# EAGLE board CoolTech (EAGLE 9.7.0)
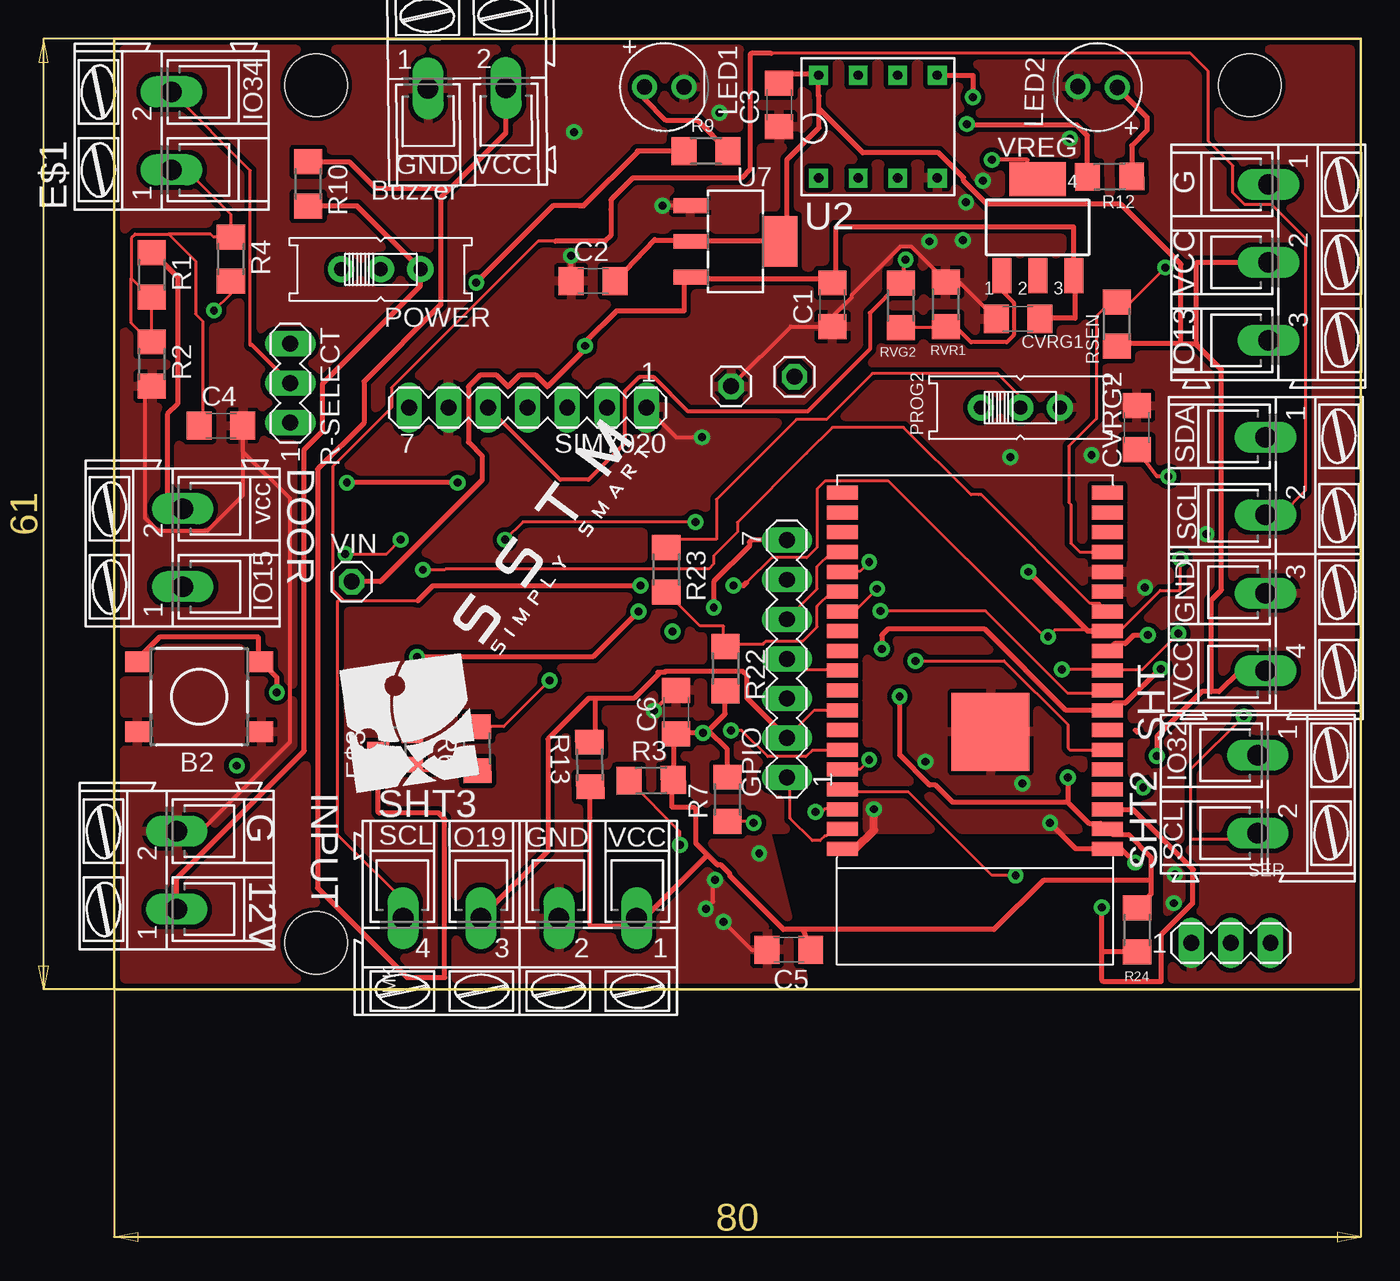
[diagram p0: board, top side]
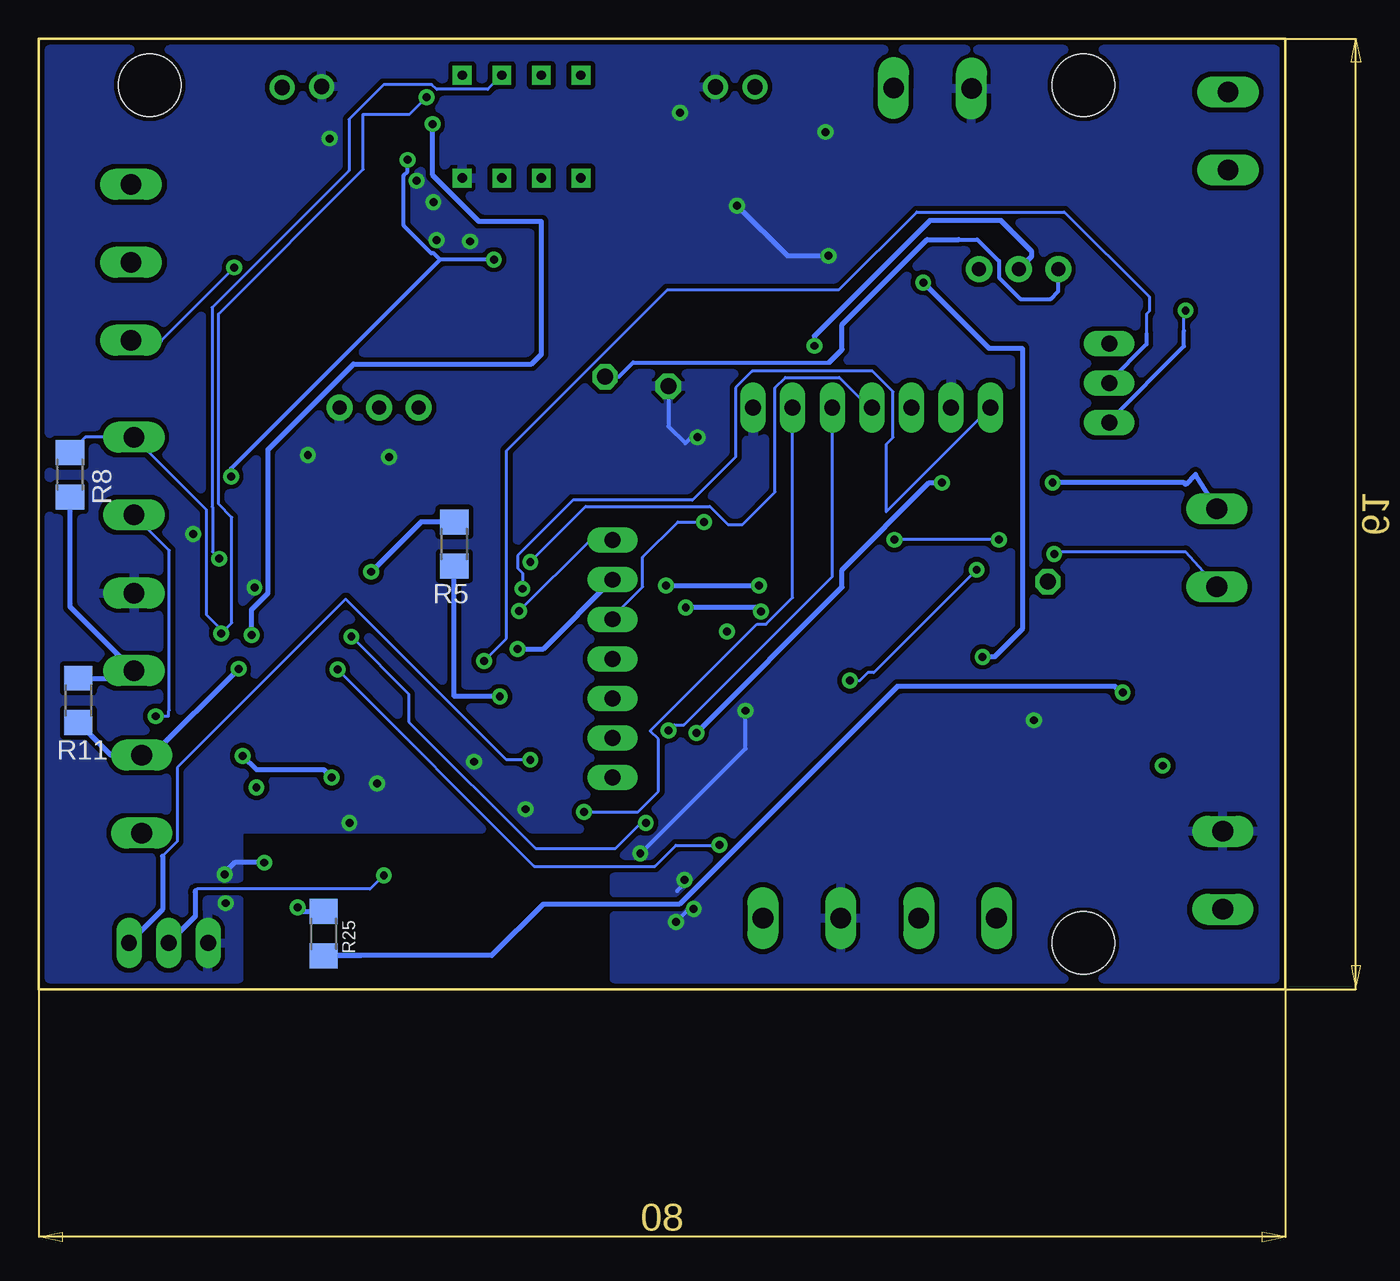
[diagram p1: board, bottom side, seen from below]

Size 80 x 61 mm. Coordinates in mm from the lower left corner, seen from the top.
Outline: 0,0 80,0 80,61 0,61 0,0
Copper layers (1*16): Top / Bottom
Stack-up Default Layer Stack: Top User Defined 0.035mm / Dielectric-1 User Defined 1.5mm / Bottom User Defined 0.035mm
Design rules: minimum copper width class=1 12mil, minimum copper width class=2 10mil, minimum copper width 8mil, minimum copper width class=0 6mil, minimum drill size 20mil, minimum drill size class=1 12mil, minimum drill size class=2 10mil, minimum drill size class=0 6mil, copper clearance class=1 to class=1 12mil, copper clearance class=2 to class=2 8mil, copper clearance wire_polygon to wire_polygon 8mil, copper clearance wire_polygon to pad_smd 8mil, copper clearance wire_polygon to via 8mil, copper clearance pad_smd to pad_smd 8mil, copper clearance pad_smd to via 8mil, copper clearance via to via 8mil, copper clearance smd to pad (same net) 8mil, copper clearance smd to via (same net) 8mil, copper clearance smd to smd (same net) 8mil, copper clearance class=0 to class=0 6mil, dimension clearance 10mil, via restrict clearance 0mil, restrict clearance 0mil, drill distance 8mil, keepout clearance 0mil
Net classes: 0 default: width 0.152 mm, drill 0.152 mm, clearance 0.152 mm; 1 ac: width 0.305 mm, drill 0.305 mm, clearance 0.305 mm; 2 power: width 0.254 mm, drill 0.254 mm, clearance 0.203 mm
Holes 4 mm at 72.9,58.04 12.95,58.04 12.95,2.97

## Footprints (pad centres in the part's own frame; a part is rotated, then mirrored left to right if it is on the bottom)
DTSM-6 = smd 1.55 x 1.3: 1 -3.975,2.25; 2 3.975,2.25; 3 -3.975,-2.25; 4 3.975,-2.25
C1206 = smd 1.6 x 1.8: 1 -1.4,0; 2 1.4,0
AK300/3 = drill 1.321 long: 1 -5.004,0; 2 0,0; 3 5.004,0
1X01 = drill 1.016 octagon: 1 0,0
AK300/2 = drill 1.321 long: 1 -2.515,0; 2 2.489,0
SOT23 = smd 1 x 1.4: 1 -0.95,-1.1; 2 0.95,-1.1; 3 0,1.1
ESP32-WROVER = smd 2 x 0.9: 1 0,22.86; 2 0,21.59; 3 0,20.32; 4 0,19.05; 5 0,17.78; 6 0,16.51; 7 0,15.24; 8 0,13.97; 9 0,12.7; 10 0,11.43; 11 0,10.16; 12 0,8.89; 13 0,7.62; 14 0,6.35; 15 0,5.08; 16 0,3.81; 17 0,2.54; 18 0,1.27; 19 0,0; 20 17,0; 21 17,1.27; 22 17,2.54; 23 17,3.81; 24 17,5.08; 25 17,6.35; 26 17,7.62; 27 17,8.89; 28 17,10.16; 29 17,11.43; 30 17,12.7; 31 17,13.97; 32 17,15.24; 33 17,16.51; 34 17,17.78; 35 17,19.05; 36 17,20.32; 37 17,21.59; 38 17,22.86 | smd 5 x 5: 39 7.5,15.36
MA07-1 = drill 1.016 long: 1 -7.62,0; 2 -5.08,0; 3 -2.54,0; 4 0,0; 5 2.54,0; 6 5.08,0; 7 7.62,0
LEDRD254W60D565H860B_W = drill 0.981 pad 1.581: A -1.27,0; C 1.27,0
EG1218 = drill 0.9 pad 1.676: O -2.54,0; P 0,0; S 2.54,0
R1206 = smd 1.6 x 1.803: 1 -1.422,0; 2 1.422,0
MA03-1 = drill 1.016 long: 1 -2.54,0; 2 0,0; 3 2.54,0
AK300/4 = drill 1.321 long: 1 -7.493,0; 2 -2.515,0; 3 2.515,0; 4 7.493,0
AA_DIP8 = drill 0.6 square: P0 -3.81,3.81; P1 -3.81,1.27; P2 -3.81,-1.27; P3 -3.81,-3.81; P4 2.79,-3.81; P5 2.79,-1.27; P6 2.79,1.27; P7 2.79,3.81
SOT223 = smd 0.95 x 2.15: 1 -2.3,-2.9; 2 0,-2.9; 3 2.3,-2.9 | smd 3.25 x 2.15: 4 0,2.9
SOT223' = smd 1.219 x 2.235: 1 -2.311,-3.099; 2 0,-3.099; 3 2.311,-3.099 | smd 3.6 x 2.2: 4 0,3.099

## Placement (x,y rotation side)
B2  DTSM-6  [DTSM-6]  5.46,18.78 0 top
C1  10u  [C1206]  46.1,43.94 90 top
C2  10u  [C1206]  30.73,45.47 0 top
C3  0.1u  [C1206]  42.67,56.77 90 top
C4  10u  [C1206]  6.86,36.17 0 top
C5  22uf  [C1206]  43.31,2.54 180 top
C6  0.1u  [C1206]  36.07,17.78 90 top
CVRG1  0.1u  [C1206]  58.02,43.03 0 top
CVRG2  1u  [C1206]  65.64,36.06 270 top
DALLAS  [AK300/3]  74.09,46.66 270 top
DC+  [1X01]  43.66,39.32 0 top
DOOR  [AK300/2]  4.39,28.35 90 top
E$1  [AK300/2]  3.68,55.12 90 top
E$2  [AK300/2]  22.66,57.83 0.5 top
E$3  [SOT23]  18.03,15.37 90 top
ESP32_WROVER  ESP32-WROVER  [ESP32-WROVER]  63.75,31.88 180 top
G4  [1X01]  39.6,38.71 0 top
GPIO  [MA07-1]  43.18,21.21 90 top
INPUT  [AK300/2]  4.01,7.65 90 top
LED1  [LEDRD254W60D565H860B_W]  35.31,57.91 0 top
LED2  [LEDRD254W60D565H860B_W]  63.12,57.91 178.7 top
POWER  [EG1218]  17.11,46.21 0 top
PROG2  [EG1218]  58.17,37.34 0 top
R1  10k  [R1206]  2.41,45.85 270 top
R2  10k  [R1206]  2.41,40.13 270 top
R3  10k  [R1206]  34.47,13.41 0.8 top
R4  22  [R1206]  7.49,46.86 270 top
R5  4.7k  [R1206]  53.34,28.57 270 bottom
R6  4.7k  [R1206]  23.29,15.44 90.9 top
R7  10k  [R1206]  39.37,12.19 90 top
R8  4.7k  [R1206]  78.01,33.02 270 bottom
R9  1k  [R1206]  37.99,53.81 180 top
R10  0.7K  [R1206]  12.45,51.69 270 top
R11  4.7k  [R1206]  77.47,18.54 270 bottom
R12  1k  [R1206]  63.89,52.15 0.7 top
R13  4.7k  [R1206]  30.53,14.43 90.9 top
R22  10k  [R1206]  39.24,20.57 270 top
R23  470  [R1206]  35.43,26.92 270 top
R24  10k  [R1206]  65.66,3.81 90 top
R25  470  [R1206]  61.72,3.57 90 bottom
R-SELECT  [MA03-1]  11.3,38.9 90 top
RSEN  4.7K  [R1206]  64.35,42.69 90 top
RVG2  240  [R1206]  50.49,43.89 90 top
RVR1  560  [R1206]  53.38,43.96 270 top
SER0  [MA03-1]  71.68,2.97 0 top
SHT  [AK300/4]  73.91,27.94 270 top
SHT2  [AK300/2]  73.41,12.52 270 top
SHT3  [AK300/4]  26.04,4.57 180 top
SIM7020  [MA07-1]  26.54,37.34 180 top
U2  FT24C512A  [AA_DIP8]  49.02,55.88 90 top
U7  LM1117MP-3.3  [SOT223]  39.88,48.01 270 top
U$2  LOGO5  [LOGO5]  19.8,8.72 53.4 top
VIN  [1X01]  15.24,26.16 0 top
VREG  317EMP  [SOT223']  59.27,48.9 0 top

## Library data of the parts
B2 = switch-tact
C1-C6 CVRG1 CVRG2 = eagle-ltspice; SPICEMODEL: NONE; SPICEPREFIX: C
DALLAS DOOR INPUT = con-ptr500+
DC+ G4 VIN = pinhead
E$1 E$2 SHT2 = con-ptr500
E$3 = Transistor
ESP32_WROVER = esp32-wrover
GPIO SER0 SIM7020 = con-lstb; OC_FARNELL: unknown; OC_NEWARK: unknown
LED1 LED2 = Opto-Electronic
POWER PROG2 = adafruit
R1-R13 R22-R25 RSEN RVG2 RVR1 = eagle-ltspice; SPICEMODEL: NONE; SPICEPREFIX: R
R-SELECT = con-lstb
SHT SHT3 = con-ptr500; OC_FARNELL: unknown; OC_NEWARK: unknown
U2 = FT24C512A
U7 = lm1117_10; MF: Texas Instruments; MPN: LM1117MP-3.3; OC_FARNELL: 9778195; OC_NEWARK: 28X3416
U$2 = bagylib
VREG = linear

## Nets
3.3V [ac]: C2.2 C3.2 C5.1 C6.1 DALLAS.2 DOOR.2 ESP32_WROVER.2 R1.1 R3.2 R5.2 R7.2 R8.2 R11.1 R13.1 R22.2 R24.2 RSEN.1 SHT3.1 SHT.4 U2.P7 U7.2 U7.4
EN: ESP32_WROVER.3 R24.1 R25.2
GND [power]: B2.3 B2.4 C1.1 C2.1 C3.1 C4.2 C5.2 C6.2 CVRG1.1 CVRG2.1 E$2.1 E$3.2 ESP32_WROVER.1 ESP32_WROVER.14 ESP32_WROVER.15 ESP32_WROVER.38 ESP32_WROVER.39 G4.1 INPUT.2 LED1.C LED2.C PROG2.S R2.2 RVR1.1 SER0.1 SHT3.2 SHT.3 SIM7020.1 SIM7020.6 U2.P3 U7.1
IO0: ESP32_WROVER.25 R22.1 R23.2
IO2: ESP32_WROVER.24 SIM7020.4
IO4: ESP32_WROVER.26 SIM7020.7
IO5: ESP32_WROVER.29 GPIO.4
IO13: DALLAS.3 ESP32_WROVER.16 RSEN.2
IO14: ESP32_WROVER.13 R6.2
IO15: DOOR.1 ESP32_WROVER.23 GPIO.5
IO18: GPIO.3
IO19: ESP32_WROVER.31 GPIO.2 R13.2 SHT3.3
IO21: ESP32_WROVER.33 SIM7020.3
IO22: ESP32_WROVER.36 SIM7020.2
IO26: ESP32_WROVER.11 R12.1
IO32: ESP32_WROVER.8 GPIO.6 R11.2 SHT2.1
IO33: ESP32_WROVER.9 GPIO.7 R9.2
IO34: E$1.2 ESP32_WROVER.6 R-SELECT.2
MOSI2: ESP32_WROVER.37 GPIO.1
N$10 [power]: DC+.1 POWER.O
N$32: LED1.A R9.1
N$34: RVG2.1 RVR1.2 VREG.1
N$37 [ac]: INPUT.1 POWER.S R10.2
N$41: PROG2.P R23.1
N$42: B2.1 B2.2 R25.1
RX: ESP32_WROVER.34 SER0.3
S$1: C4.1 E$1.1 R1.2 R2.1 R4.1
S$3: LED2.A R12.2
S$4: R4.2 R-SELECT.1
S$7: E$3.1 R6.1
S$8: ESP32_WROVER.30
S$10: E$2.2 E$3.3 R10.1
S_VN: ESP32_WROVER.5
S_VP: ESP32_WROVER.4
SCL_ESP: ESP32_WROVER.12 R5.1 R7.1 SHT2.2 SHT3.4 SHT.2 U2.P5
SDA_ESP: ESP32_WROVER.10 R3.1 R8.1 SHT.1 U2.P4
TX: ESP32_WROVER.35 SER0.2
VCC [power]: CVRG2.2 RVG2.2 SIM7020.5 VREG.4
VIN [ac]: C1.2 CVRG1.2 POWER.P U7.3 VIN.1 VREG.3

## Tracks (layer width: path | path; a pad name or v marks a point on that pad's centre or on a via)
3.3V  (via drill 0.51)
  Top 0.305: 70.41,19.1 70.92,19.1 72.24,20.42 73.86,20.42 SHT.4 | 70.41,19.1 69.8,19.1 66.93,16.23 v66.93,14.99 | C3.2 43.26,58.73 45.21,58.73 U2.P7 45.21,57.33 45.24,57.35 45.24,56.52 | C2.2 34.68,48.12 34.75,48.06 36.88,48.06 U7.2 37.08,48.06 42.77,48.06 U7.4 42.88,48.16 43.18,48.46 43.18,53.24 45.24,55.3 45.24,56.52 | 68.48,41.45 69.39,41.45 | 68.48,41.45 64.39,41.45 RSEN.1 | 45.24,56.52 48.06,53.7 52.92,53.7 54.51,52.11 54.51,51.92 56.03,50.39 64.62,50.39 68.48,46.54 68.48,41.45 | 63.7,10.26 ESP32_WROVER.2 64.12,9.92 65.1,9.92 66.55,8.48 66.55,6.99 | 44.22,3.83 C5.1 | 66.55,6.99 66.55,6.12 R24.2 | 63.7,10.26 63.31,10.65 62.56,10.65 61.21,12 | v61.21,13.59 61.21,12 | 70.41,19.1 70.41,24.98 71.07,25.64 71.07,39.78 69.39,41.45 | 44.22,3.83 56.48,3.83 59.62,6.99 66.55,6.99 | 63.7,10.26 62.9,10.26 | 44.22,3.83 42.96,3.83 39.53,7.27 39.53,7.41 38.96,7.98 38.73,7.98 38.08,8.62 | R22.2 39.22,19.1 39.22,17.68 38.15,16.61 | R7.2 39.32,13.61 39.32,15.44 38.15,16.61 | 38.15,16.61 38.14,16.62 37.97,16.46 v37.8,16.46 36.17,16.46 C6.1 35.89,16.2 35.89,13.46 | R1.1 2.51,47.27 4.06,45.72 4.06,37.57 3.4,36.91 3.4,30.84 DOOR.2 | v22.05,32.51 v14.94,32.51 | 35.89,13.46 R3.2 | 38.08,8.62 37.34,9.37 37.34,11.56 37.21,11.68 35.81,11.68 35.81,13.39 35.89,13.46 | 38.08,8.62 34.04,4.57 | 34.04,4.57 SHT3.1 | R13.1 30.55,4.12 30.61,4.06 33.53,4.06 34.04,4.57 | 69.39,41.45 69.47,41.53 69.47,46.61 69.52,46.66 DALLAS.2 | 61.21,12 53.82,12 52.71,13.12 52.34,13.12 50.42,15.04 v50.42,18.8
  Bottom 0.305: v66.93,14.99 66.04,14.1 61.72,14.1 v61.21,13.59 | R11.1 74.4,19.96 SHT.4 78.01,24.54 R8.2 | v37.8,16.46 28.45,25.81 28.45,26.92 22.86,32.51 v22.05,32.51 | v14.94,32.51 6.5,32.51 6.4,32.41 5.76,33.05 DOOR.2 | v50.42,18.8 53.34,18.8 R5.2
EN  (via drill 0.51)
  Top 0.203: ESP32_WROVER.3 63.55,11.76
  Top 0.305: ESP32_WROVER.3 65.38,11.56 69.2,7.74 | 69.2,7.74 69.27,7.67 | 63.4,2.29 63.4,0.58 63.5,0.48 67.18,0.48 67.18,3.48 69.2,5.5 69.2,7.74 | 63.4,2.29 v63.4,5.26 | R24.1 63.5,2.39 63.4,2.29
  Bottom 0.305: v63.4,5.26 63.4,5.09 63.5,4.99 R25.2
GND  (via drill 0.51)
  Top 0.254: CVRG1.1 54.26,45.39 RVR1.1 53.38,45.46 51.16,47.68 50.45,47.68 47.33,44.55 47.33,44.41 46.1,43.17 C1.1 43.43,42.54 G4.1 | U7.1 v35.19,50.31 | v37.72,35.43 36.07,35.43 SIM7020.1 | 63.7,25.6 ESP32_WROVER.14 | R2.2 1.98,38.28 1.98,30.25 2.81,29.42 5.97,29.42 8.26,31.7 C4.2 8.26,34.52 11.28,31.5 11.28,15.88 5.54,10.14 INPUT.2 | C5.2 40.89,2.54 v39.12,4.32 | 64.55,9.02 63.76,9.02 | v37.97,5.16 38.44,5.63 38.44,6.89 v38.56,7.01 | v34.65,17.88 35.87,19.1 36.07,19.1 C6.2
  Top 0.305: C2.1 v29.33,47.08 | 63.76,9.02 ESP32_WROVER.1 | ESP32_WROVER.1 61.72,9.02 v60.07,10.67 | ESP32_WROVER.1 64.64,9.02 v65.53,8.13
  Top 0.508: ESP32_WROVER.38 46.77,9 47.56,9 48.77,10.2 v48.77,11.56
  Bottom 0.254: G4.1 39.6,36.13 38.52,35.04 38.12,35.43 v37.72,35.43 | 35.19,50.62 v35.19,50.31 | v39.12,4.32 38.28,5.16 v37.97,5.16 | v34.65,17.88 34.65,15.44 41.35,8.74 v41.4,8.71 | 39.04,6.3 38.56,6.78 v38.56,7.01
  Bottom 0.305: v29.33,47.08 31.96,47.08 v35.19,50.31 | v65.53,8.13 67.44,8.13 68.07,7.49
  other vias: 52.07,14.61 52.32,48.01 62.74,34.29 57.53,34.16 29.52,55.03 38.86,56.26 70.1,29.21 68.01,5.53 68.07,7.37 61.34,54.61 54.47,48.08 54.68,50.52 55.75,51.89 66.17,25.78 58.29,13.21 16.13,17.27
  pour Top (isolate 0.305): 80.31,62.53 -0.3,62.53 -0.3,-0.3 80.31,-0.3
  pour Bottom (isolate 0.305): 80.31,63.8 -0.3,63.8 -0.3,-0.3 80.31,-0.3
IO0
  Top 0.203: 39.22,22.15 39.22,22.05 R22.1 39.22,22.15 | R23.2 37.61,23.32 39.12,23.31 39.12,22.15 39.22,22.15 | 39.22,22.15 41.66,22.15 41.86,22.35 44.2,22.35 45.11,23.27 45.11,24.59 46.02,25.5 46.74,25.5 ESP32_WROVER.25
IO2  (via drill 0.51)
  Top 0.203: v48.46,27.43 47.85,26.82 46.84,26.82 ESP32_WROVER.24
  Bottom 0.203: v48.46,27.43 44.91,30.99 36.94,30.99 35.77,29.82 34.84,29.82 32.74,31.92 32.74,38.61 32.09,39.27 28.62,39.27 26.69,37.34 SIM7020.4
IO4  (via drill 0.51)
  Top 0.203: v48.97,25.7 47.55,24.28 46.84,24.28 ESP32_WROVER.26
  Bottom 0.203: v48.97,25.7 48.97,26.72 49.28,27.03 49.28,27.84 45.72,31.39 38.05,31.39 35.28,34.17 35.28,38.61 34.22,39.67 26.49,39.67 25.17,38.36 25.17,35.43 25.61,34.99 25.61,30.65 SIM7020.7
IO5
  Top 0.203: ESP32_WROVER.29 46.74,20.52 43.79,20.52 43.18,21.13 GPIO.4
IO13  (via drill 0.51)
  Top 0.203: ESP32_WROVER.16 63.8,28.04 63.78,28.07 61.98,28.07 61.4,28.64 61.4,31.11 61.28,31.24 61.28,34.86 63.04,36.63 63.04,43.21 63.93,44.09 64.34,44.09 RSEN.2 65.25,44.12 v67.46,46.33
  Bottom 0.203: 72.19,41.61 v67.46,46.33
  Bottom 0.305: DALLAS.3 74.04,41.61 72.19,41.61
IO14  (via drill 0.51)
  Top 0.203: 63.14,24.26 ESP32_WROVER.13 63.24,24.77 62.63,24.77 55.65,31.75 55.5,31.75 54.99,31.75 50.67,36.07 46.1,36.07 44.45,34.42 40.01,29.97 40.01,29.34 38.48,27.81 38.48,27.3 38.16,26.99 21.27,26.99 21.21,26.92 | 21.21,26.92 21.08,26.92 | 21.21,26.92 v19.81,26.92 | v27.94,19.81 24.99,16.86 R6.2
  Bottom 0.203: v19.81,26.92 26.42,20.32 26.8,20.32 27.3,19.81 v27.94,19.81
IO15  (via drill 0.51)
  Top 0.203: ESP32_WROVER.23 46.74,28.04 46.02,28.04 45.11,27.13 45.11,25.7 43.18,23.77 GPIO.5 | v14.83,27.94 17.48,27.94 v18.39,28.85 | v37.31,30 26.24,30 v25.09,28.85
  Bottom 0.203: v14.83,27.94 14.71,28.07 6.4,28.07 6.39,28.07 DOOR.1 | v18.39,28.85 v25.09,28.85 | v37.31,30 38.99,30 41.25,27.74 41.25,25.83 43.18,23.9 GPIO.5
IO18
  Top 0.203: 43.18,18.69 GPIO.3
IO19
  Top 0.203: ESP32_WROVER.31 46.74,17.88 44.91,17.88 43.18,16.15 GPIO.2
  Top 0.305: GPIO.2 40.6,18.71 40.6,20.14 40.33,20.41 35.4,20.41 35.33,20.34 35.02,20.34 | 35.02,20.34 34.89,20.34 | SHT3.3 27.84,8.89 27.84,16.05 30.45,18.67 30.86,18.67 | 30.86,18.67 33.35,18.67 35.02,20.34 | 30.86,18.67 30.86,16.2 R13.2
IO21  (via drill 0.51)
  Top 0.203: ESP32_WROVER.33 46.74,15.34 44.81,15.34 44.4,14.94 41.96,14.94 40.27,16.62 v39.58,16.62
  Bottom 0.203: SIM7020.3 29.08,26.49 38.61,16.97 39.24,16.97 v39.58,16.62
IO22  (via drill 0.51)
  Top 0.203: v45.01,11.38 45.41,11.38 45.62,11.58 46.74,11.58 ESP32_WROVER.36
  Bottom 0.203: v45.01,11.38 41.55,11.38 40.23,12.7 40.23,16.05 40.74,16.56 40.74,16.61 33.91,23.44 33.32,23.44 31.62,25.14 SIM7020.2
IO26  (via drill 0.51)
  Top 0.305: ESP32_WROVER.11 64.22,22.18 64.9,22.18 65.45,22.73 v66.35,22.73 | R12.1 62.47,54.8 61.8,55.47 54.8,55.47 v54.73,55.54
  Bottom 0.305: v54.73,55.54 54.73,52.26 51.75,49.28 47.75,49.28 47.75,40.77 48.39,40.13 59.82,40.13 65.3,34.65 65.3,25.42 66.35,24.37 v66.35,22.73
IO32  (via drill 0.51)
  Top 0.203: ESP32_WROVER.8 63.73,17.88
  Top 0.305: v49.28,21.84 49.28,22.73 49.66,23.11 55.88,23.11 61.09,17.91 ESP32_WROVER.8 64.22,18.37 64.9,18.37 67.1,20.57 v67.19,20.57
  Bottom 0.203: 43.18,26.21 GPIO.6
  Bottom 0.305: R11.2 75.38,15.03 SHT2.1 72.72,15.03 v67.19,20.57 | v49.28,21.84 47.62,21.84 GPIO.6
IO33  (via drill 0.51)
  Top 0.203: ESP32_WROVER.9 63.63,19 61.21,19 55.92,24.28 v49.17,24.28
  Top 0.305: v33.66,24.26 30.76,21.36 19.46,21.36 v19.43,21.34 | GPIO.7 40.89,28.83 40.77,28.7 40.77,28.45 38.48,26.16 v38.48,24.51 | R9.2 33.66,53.8 | 33.66,53.8 33.57,53.8 | v23.24,45.36 28.17,50.29 30.1,50.29 29.84,50.29 30.14,50.29 33.66,53.8
  Bottom 0.203: v49.17,24.28 44.7,28.75 43.18,28.75 GPIO.7
  Bottom 0.305: v33.66,24.26 33.91,24.51 v38.48,24.51 | v23.24,45.36 19.02,41.15 16.89,41.15 16.89,23.11 18.67,21.34 v19.43,21.34
IO34  (via drill 0.51)
  Top 0.203: 8.74,41.37 8.74,52.55 E$1.2 | ESP32_WROVER.6 61.34,15.37 61.21,15.49 61.21,16.99 57.12,21.08 v51.44,21.08
  Top 0.254: 8.74,41.37 8.84,41.37 R-SELECT.2
  Bottom 0.203: 8.91,42.08 8.91,43.35 8.74,43.52 8.74,44.45 14.19,49.9 23.65,49.9 28.65,44.89 39.67,44.89 49.99,34.57 49.99,22.53 v51.44,21.08
  Bottom 0.254: R-SELECT.2 11.3,39.02 8.91,41.41 8.91,42.08
MOSI2
  Top 0.203: ESP32_WROVER.37 46.74,10.26 46.13,10.26 45.72,9.86 45.62,9.86 45.31,9.55 44.81,9.55 43.38,10.97 43.38,13.31 43.18,13.51 GPIO.1
N$10
  Bottom 0.254: DC+.1 43.59,39.32 42.77,39.32 41.86,40.23 29.28,40.23 | POWER.O 14.57,44.8 15.06,44.31 17,44.31 18.38,45.69 18.38,46.74 19.77,48.12 20.95,48.12 21.26,48.12
  Bottom 0.305: 29.28,40.23 28.45,41.06 28.45,42.67 23,48.12 20.95,48.12
N$32
  Top 0.305: R9.1 37.46,55.75 35.43,55.75 34.04,57.15 LED1.A
N$34
  Top 0.203: RVG2.1 53.34,42.47 RVR1.2 53.44,42.57
  Top 0.254: 53.44,42.57 53.95,42.57 54.99,41.53 57.28,41.53 57.75,41.99 57.75,44.07 56.96,44.85 VREG.1
N$37
  Top 0.305: INPUT.1 4.01,7.1 6.45,9.54 6.45,9.57 12.19,15.31 12.19,34.64 13.39,35.84 13.39,38.89 19.65,45.15 POWER.S 15.6,50.27 R10.2
N$41
  Top 0.203: R23.1 35.95,28.86 38.66,28.88 38.66,31.45 43.79,36.58 45.72,36.58 48.67,39.52 56.69,39.52 58.12,38.1 58.12,37.39 PROG2.P
N$42  (via drill 0.51)
  Top 0.203: 9.29,21.03 B2.2 | B2.1 1.49,21.17
  Top 0.305: 1.49,21.17 2.92,22.61 9.27,22.61 9.27,21.2 B2.2 10.44,20.03 v10.44,19.05
  Bottom 0.305: 59.34,2.15 R25.1 50.94,2.16 47.64,5.46 38.89,5.46 24.91,19.45 10.94,19.45 10.54,19.05 v10.44,19.05
RX  (via drill 0.51)
  Top 0.203: v48.46,14.73 47.85,14.12 46.84,14.12 ESP32_WROVER.34
  Bottom 0.203: v48.46,14.73 49.99,14.73 60.3,25.05 71.12,14.23 71.12,9.49 72.06,8.55
  Bottom 0.305: SER0.3 72.06,5.13 72.06,8.55
S$1
  Top 0.203: 1.1,45.63 1.1,42.76 2.31,41.55 R2.1 R1.2 2.31,44.42 1.1,45.63 | 3.48,48.48 1.34,48.48 1.1,48.24 1.1,45.63 | C4.1 5.46,36.27 5.69,36.5 5.69,42.88 5.22,43.35 5.22,46.74 3.48,48.48 | 3.48,48.48 6.18,48.48 6.38,48.28 R4.1 7.49,49.74 4.63,52.6 E$1.1
S$3
  Top 0.305: R12.2 65.31,54.15 66.29,55.13 66.29,55.98 LED2.A
S$4  (via drill 0.51)
  Top 0.203: v6.4,43.57 7.49,44.67 R4.2
  Bottom 0.203: v6.4,43.57 6.5,43.47 6.5,42.27
  Bottom 0.254: R-SELECT.1 11.3,36.48 6.5,41.27 6.5,42.27
S$6
  Top 0.305: 65.66,16.51 65.53,16.64
S$7
  Top 0.203: R6.1 19.53,14.02 E$3.1
S$8
  Top 0.203: 46.74,19.1 ESP32_WROVER.30
S$9  (via drill 0.51)
  Top 0.203: 66.17,12.95 v66.04,12.95
S$10
  Top 0.305: R10.1 15.09,53.11 16.38,51.82 16.76,51.44 21.59,51.44 | 21.59,51.44 25.15,54.99 E$2.2 | 21.59,51.44 20.95,50.8 20.95,44.07 20.95,43.94 16.03,39.01 16.03,36.35 13.06,33.38 13.06,6.5 18.8,0.76 21.21,0.76 21.21,10.92 20.83,11.3 17.02,11.3 16.93,11.39 E$3.3
S$11  (via drill 0.51)
  other vias: 35.84,22.96
S$12  (via drill 0.51)
  other vias: 7.87,14.35
SCL_ESP  (via drill 0.51)
  Top 0.203: SHT.2 74.91,30.45 76.48,32.03 76.48,48.18 74.29,50.37 72.56,50.37 71.8,51.13 71.8,52.85 70.22,54.44 70.22,58.94 69.08,60.07 42.16,60.07 41.94,60.07 | 31.91,50.04 31.88,50.04 | 15.75,24.94 14.73,24.94 14.02,25.66 14.02,33.57 17.8,37.35 17.8,38.61 27.21,48.02 28.31,48.02 | 15.75,24.94 14.35,24.94 14.35,9.91 19.18,5.08 | 15.75,24.94 19.5,24.94 | 40.6,26.1 42.21,27.71 44.46,27.71 45.11,28.37 45.11,32.11 45.63,32.63 49.69,32.63 59.69,22.63 v59.94,22.63 60.38,23.06 63.7,23.06 ESP32_WROVER.12 63.8,23.06 64.6,23.06 67.14,25.6 68.43,25.6 v68.43,27.64 | v41.05,10.67 40.95,10.77 39.42,10.77 R7.1 | v72.52,17.53 69.09,14.1 69.09,9.65 73.03,9.65 SHT2.2
  Top 0.305: 40.6,26.1 40.41,25.91 v39.75,25.91 | 42.16,60.07 40.89,60.07 40.82,59.99 40.82,52.63 40.26,52.07 33.27,52.07 31.88,50.67 31.88,50.04 31.88,48.39 31.5,48.02 28.31,48.02 | 18.41,4.32 18.54,4.45 | 18.54,4.45 19.18,5.08 | 18.54,4.45 SHT3.4 | v58.67,26.8 62.48,22.99 ESP32_WROVER.12 | 19.5,24.94 20.46,25.91 v33.78,25.91
  Bottom 0.203: v59.94,22.63 56.26,18.95 56.26,17.17 48.13,9.04 42.98,9.04 41.35,10.67 v41.05,10.67 | v68.43,27.64 68.86,28.07 68.86,30.95 68.89,30.98 68.89,43.76 60.1,52.55 60.1,55.84 57.87,58.07 54.79,58.07 54.47,57.76 51.2,57.76 U2.P5 | SHT.2 71.63,28.17 71.63,17.91 71.7,17.83 71.7,17.53 v72.52,17.53
  Bottom 0.305: v33.78,25.91 v39.75,25.91 39.88,26.04 | R5.1 55.47,30 v58.67,26.8
SDA_ESP  (via drill 0.51)
  Top 0.203: 52.88,58.62 U2.P4 | v60.83,20.52 63.7,20.52 ESP32_WROVER.10 63.8,20.52 65.99,20.52 v68.3,22.84 | R3.1 36.3,10.14 36.3,9.28 v36.31,9.26
  Top 0.305: U2.P4 55.12,58.67 v55.12,57.26
  Bottom 0.203: v60.83,20.52 48.21,7.9 40.46,7.9 39.12,9.25 36.33,9.25 v36.31,9.26 | v55.12,57.26 56.22,56.16 59.2,56.16 59.18,56.14 59.18,52.63 68.48,43.34 68.48,31.15 67.61,30.28 67.61,23.52 v68.3,22.84 68.18,22.96 69.27,24.05 69.27,30.79 SHT.1 77.02,35.43 R8.1
TX  (via drill 0.51)
  Top 0.203: v57.86,7.32 56.34,7.32 50.99,12.66 46.92,12.66 ESP32_WROVER.35
  Bottom 0.203: 70.05,6.23 69.95,6.33 69.86,6.43 58.75,6.43 v57.86,7.32
  Bottom 0.305: SER0.2 69.95,4.7 69.95,6.33
VCC  (via drill 0.51)
  Top 0.254: v50.8,46.84 50.7,46.74 50.7,45.62 50.49,45.41 RVG2.2 50.39,45.31 48.5,43.42 48.5,41.08 44.5,37.08 36.85,37.08 34.64,39.29 33.69,39.29 32.77,38.37 32.77,35.04 30.45,32.72 28.63,32.72 SIM7020.5 | v67.67,32.92 66.94,32.92 CVRG2.2 | VREG.4 58.62,52.65 58.62,53.24 v56.34,53.24
  Bottom 0.254: v67.67,32.92 67.67,33.43 54.25,46.84 | v50.8,46.84 54.25,46.84 | 54.25,46.84 54.66,47.24 54.82,47.24 56.59,49.02 56.59,52.24 56.34,52.49 v56.34,53.24
VIN  (via drill 0.51)
  Top 0.305: CVRG1.2 59.44,43.08 61.67,43.08 61.67,45.52 61.57,45.62 61.57,45.77 VREG.3 61.57,45.87 61.57,48.95 46.33,48.95 46.33,45.52 46.23,45.41 C1.2 46.18,45.26 46.28,45.26 45.92,45.62 38.2,45.62 38,45.82 37.08,45.82 U7.3 36.88,45.62 36.58,45.31 36.58,43.54 32.23,43.54 30.23,41.53 v30.23,41.3 30.23,41.09 27.81,38.68 27.07,39.42 26.02,39.42 25.27,38.68 24.53,39.42 23.48,39.42 22.73,38.68 22.73,35.11 23.62,34.22 23.62,32.7 17.09,26.16 VIN.1
  Bottom 0.305: v30.23,41.3 30.23,41.94 22.82,49.34 18.25,49.34 16.27,47.36 16.27,47.05 POWER.P
(copper drawn outside any net)
  shapes: Bottom area x1, Top area x1

## Text on the board
tNames: IO34 | GND | VCC | Buzzer | G | VCC | IO13 | SDA | vcc | SCL | IO15 | GND | VCC | IO32 | G | SCL | IO19 | GND | VCC | SCL | 12V | SER | MK